# EAGLE board AstableMultivibrator-PNP-CapPol (EAGLE 7.6.0)
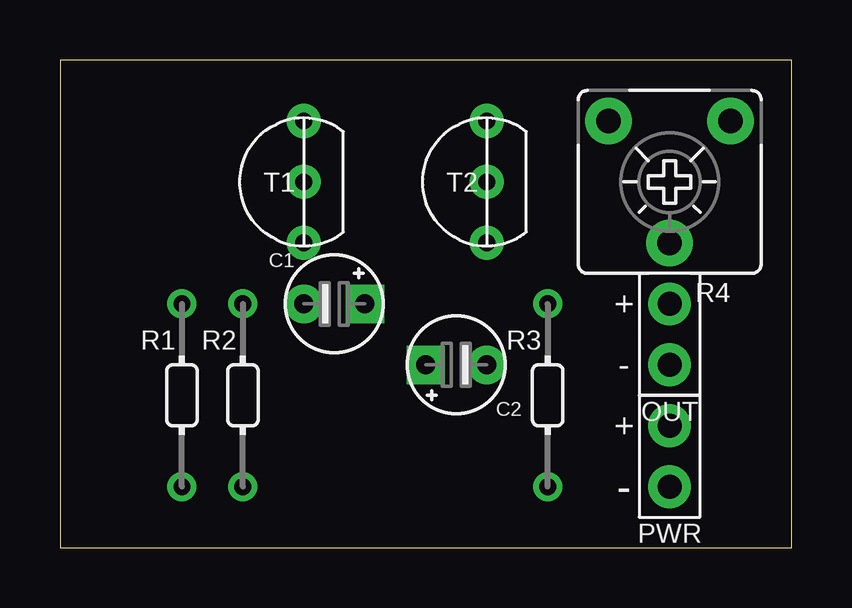
[diagram p0: board, top side]
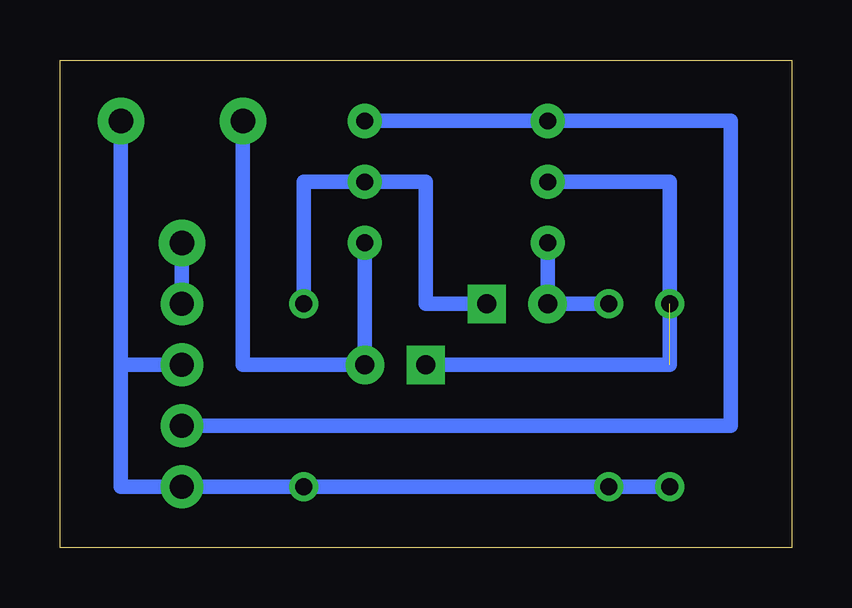
[diagram p1: board, bottom side, seen from below]

Size 30.48 x 20.32 mm. Coordinates in mm from the lower left corner, seen from the top.
Outline: 0,0 30.48,0 30.48,20.32 0,20.32 0,0
Copper layers (1*16): Top 0.035mm / dielectric 1.5mm / Bottom 0.035mm
Design rules "default": minimum track width 10mil, minimum drill 24mil, track to track 8mil, track to pad 8mil, pad to pad 8mil, via to via 8mil, smd to smd 8mil, copper to edge 40mil, drill to drill 8mil, minimum pad ring 10mil, minimum via ring 8mil, stop-mask expansion 4mil, vias tented up to drill 0mil, thermal gap 10mil
Net classes: 0 default: width 0.61 mm

## Footprints (pad centres in the part's own frame; a part is rotated, then mirrored left to right if it is on the bottom)
E2,5-4 = drill 0.8 pad 1.6 square: + 1.27,0 | drill 0.8 pad 1.6: - -1.27,0
PWR-L = drill 1 pad 1.778: 1 0,-1.27; 2 0,1.27
SPAD-+ = drill 1 pad 1.778: 1 0,-1.27; 2 0,1.27
0202/7-V = drill 0.7: 1 0,-3.81; 2 0,3.81
POT-V = drill 1.016 pad 1.93: A -2.54,-2.54; E 2.54,-2.54; S 0,2.54
TO92-CBE = drill 0.7 pad 1.422: B 0,0; C 0,2.54; E 0,-2.54

## Placement (x,y rotation side)
C1  10uF  [E2,5-4]  11.43,10.16 0 top
C2  10uF  [E2,5-4]  16.51,7.62 180 top
J1  [PWR-L]  25.4,3.81 0 top
OUT  SPAD+--+  [SPAD-+]  25.4,8.89 0 top
R1  47k  [0202/7-V]  5.08,6.35 0 top
R2  5.1k  [0202/7-V]  7.62,6.35 0 top
R3  47k  [0202/7-V]  20.32,6.35 0 top
R4  5k  [POT-V]  25.4,15.24 180 top
T1  BC557  [TO92-CBE]  10.16,15.24 180 top
T2  BC557  [TO92-CBE]  17.78,15.24 180 top

## Library data of the parts
C1 C2 = c
J1 OUT = pad
R1-R4 = r
T1 T2 = t

## Nets
GND: J1.1 OUT.1 R1.1 R2.1 R3.1 R4.A
N$1: C2.- R4.E T2.C
N$2: C1.- R2.2 T1.C
N$3: C2.+ R1.2 T1.B
N$4: C1.+ R3.2 T2.B
N$6: OUT.2 R4.S
VCC: J1.2 T1.E T2.E

## Tracks (layer width: path | path; a pad name or v marks a point on that pad's centre or on a via)
GND
  Bottom 0.61: R4.A 27.94,7.62 | 27.94,7.62 OUT.1 | 27.94,7.62 27.94,2.54 J1.1 R3.1 R2.1 R1.1
N$1
  Bottom 0.61: T2.C C2.- 22.86,7.62 R4.E
N$2
  Bottom 0.61: R2.2 C1.- T1.C
N$3  (1 unrouted)
  Bottom 0.61: C2.+ 5.08,7.62 5.08,15.24 T1.B
N$4
  Bottom 0.61: R3.2 20.32,15.24 T2.B 15.24,15.24 15.24,10.16 C1.+
N$6
  Bottom 0.61: OUT.2 R4.S
VCC
  Bottom 0.61: T2.E T1.E 2.54,17.78 2.54,5.08 J1.2